# EAGLE board Secondary Board PCB v17 (EAGLE 9.7.0)
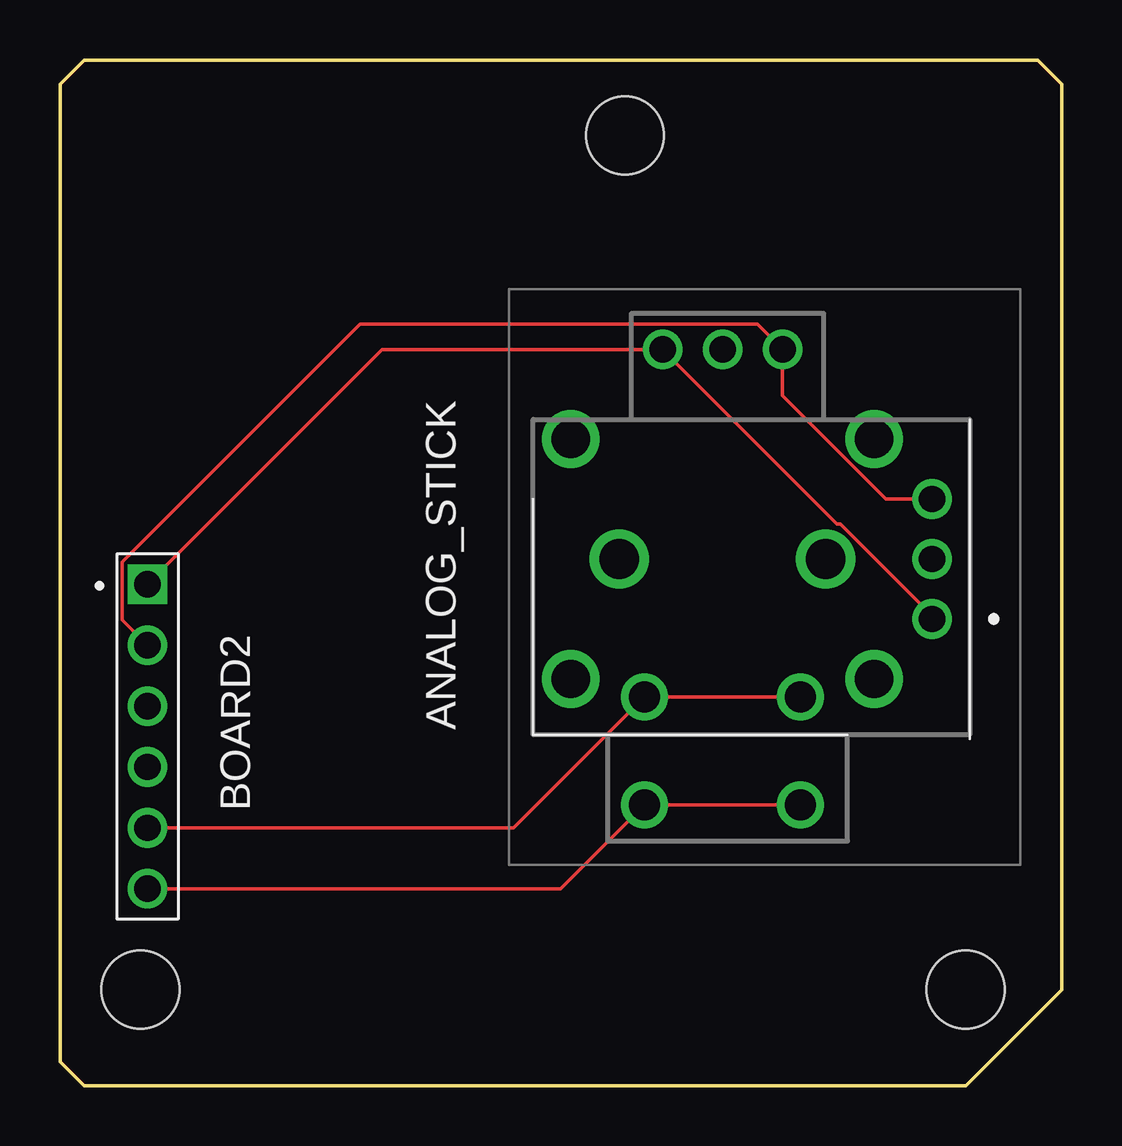
[diagram p0: board, top side]
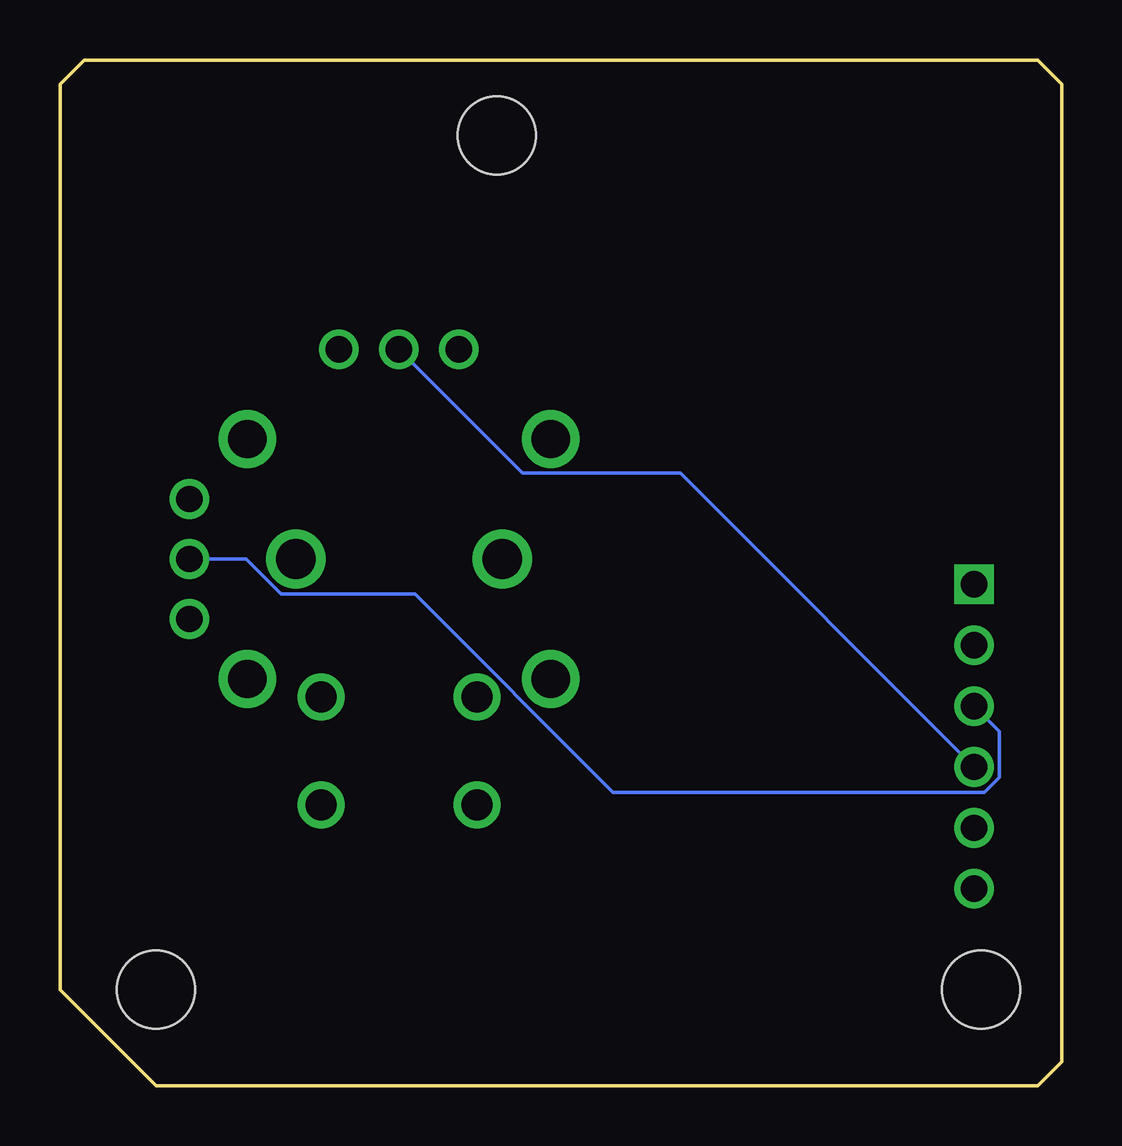
[diagram p1: board, bottom side, seen from below]

Size 41.75 x 42.75 mm. Coordinates in mm from the lower left corner, seen from the top.
Outline: 0,1 0,41.75 1,42.75 40.75,42.75 41.75,41.75 41.75,4 37.75,0 1,0 0,1
Copper layers (1*16): Top / Bottom
Stack-up Default Layer Stack: Top User Defined 0.035mm / Dielectric-1 User Defined 1.5mm / Bottom User Defined 0.035mm
Design rules "default": minimum track width 6mil, minimum drill 0.35mm, track to track 6mil, track to pad 6mil, pad to pad 6mil, via to via 6mil, smd to smd 6mil, copper to edge 40mil, drill to drill 6mil, minimum pad ring 10mil, minimum via ring 8mil, stop-mask expansion 4mil, vias tented up to drill 0mil, thermal gap 10mil
Holes 3.25 mm at 23.55,39.6 37.75,4 3.35,4

## Footprints (pad centres in the part's own frame; a part is rotated, then mirrored left to right if it is on the bottom)
RKJXV122400R = drill 1.3 pad 1.95: A1 -11.98,-3.25; B1 -11.98,-7.75; C1 -5.48,-3.25; D1 -5.48,-7.75 | drill 1.1 pad 1.65: A11 0,0; A12 0,2.5; A13 0,5; B11 -6.23,11.23; B12 -8.73,11.23; B13 -11.23,11.23 | drill 1.6 pad 2.4: MH1 -15.055,-2.5; MH2 -15.055,7.5; MH3 -2.405,-2.5; MH4 -2.405,7.5 | drill 1.65 pad 2.475: MH5 -13.03,2.5; MH6 -4.43,2.5
61300611121 = drill 1.1 square: 1 -6.35,0 | drill 1.1: 2 -3.81,0; 3 -1.27,0; 4 1.27,0; 5 3.81,0; 6 6.35,0

## Placement (x,y rotation side)
ANALOG_STICK  RKJXV122400R  [RKJXV122400R]  36.35,19.45 0 top
BOARD2  61300611121  [61300611121]  3.65,14.55 270 top

## Library data of the parts
ANALOG_STICK = SamacSys_Parts; DESCRIPTION: RKJXV122400R; HEIGHT: 18.95mm; MANUFACTURER_NAME: ALPS; MANUFACTURER_PART_NUMBER: RKJXV122400R; MOUSER_PART_NUMBER: 688-RKJXV122400R; MOUSER_PRICE-STOCK: https://www.mouser.co.uk/ProductDetail/ALPS/RKJXV122400R?qs=GedFDFLaBXEbB%252ByoOVwLBg%3D%3D
BOARD2 = Headers; CREATED_BY: PCBLayout.com; DIGI_KEY_PART_NUMBER: 732-5319-ND; MANUFACTURER: Wurth Electronics Inc.; MPN: 61300611121

## Nets
N$1: ANALOG_STICK.A13 ANALOG_STICK.B11 BOARD2.2
N$2: ANALOG_STICK.A11 ANALOG_STICK.B13 BOARD2.1
N$3: ANALOG_STICK.B1 ANALOG_STICK.D1 BOARD2.6
N$4: ANALOG_STICK.A1 ANALOG_STICK.C1 BOARD2.5
N$5: ANALOG_STICK.B12 BOARD2.4
N$6: ANALOG_STICK.A12 BOARD2.3

## Tracks (layer width: path | path; a pad name or v marks a point on that pad's centre or on a via)
N$1
  Top 0.152: ANALOG_STICK.A13 34.42,24.45 30.12,28.75 ANALOG_STICK.B11 29.07,31.73 12.51,31.73 2.6,21.82 2.6,19.41 BOARD2.2
N$2
  Top 0.152: BOARD2.1 13.43,30.68 ANALOG_STICK.B13 32.38,23.42 32.53,23.42 36.35,19.59 ANALOG_STICK.A11
N$3
  Top 0.152: ANALOG_STICK.D1 ANALOG_STICK.B1 20.87,8.2 BOARD2.6
N$4
  Top 0.152: BOARD2.5 18.91,10.74 ANALOG_STICK.A1 ANALOG_STICK.C1
N$5
  Bottom 0.152: BOARD2.4 15.89,25.52 22.46,25.52 ANALOG_STICK.B12
N$6
  Bottom 0.152: BOARD2.3 2.6,14.77 2.6,12.84 3.21,12.23 18.69,12.23 26.95,20.48 32.53,20.48 33.99,21.95 ANALOG_STICK.A12